# Allegro board BBB_SIMULATION.brd
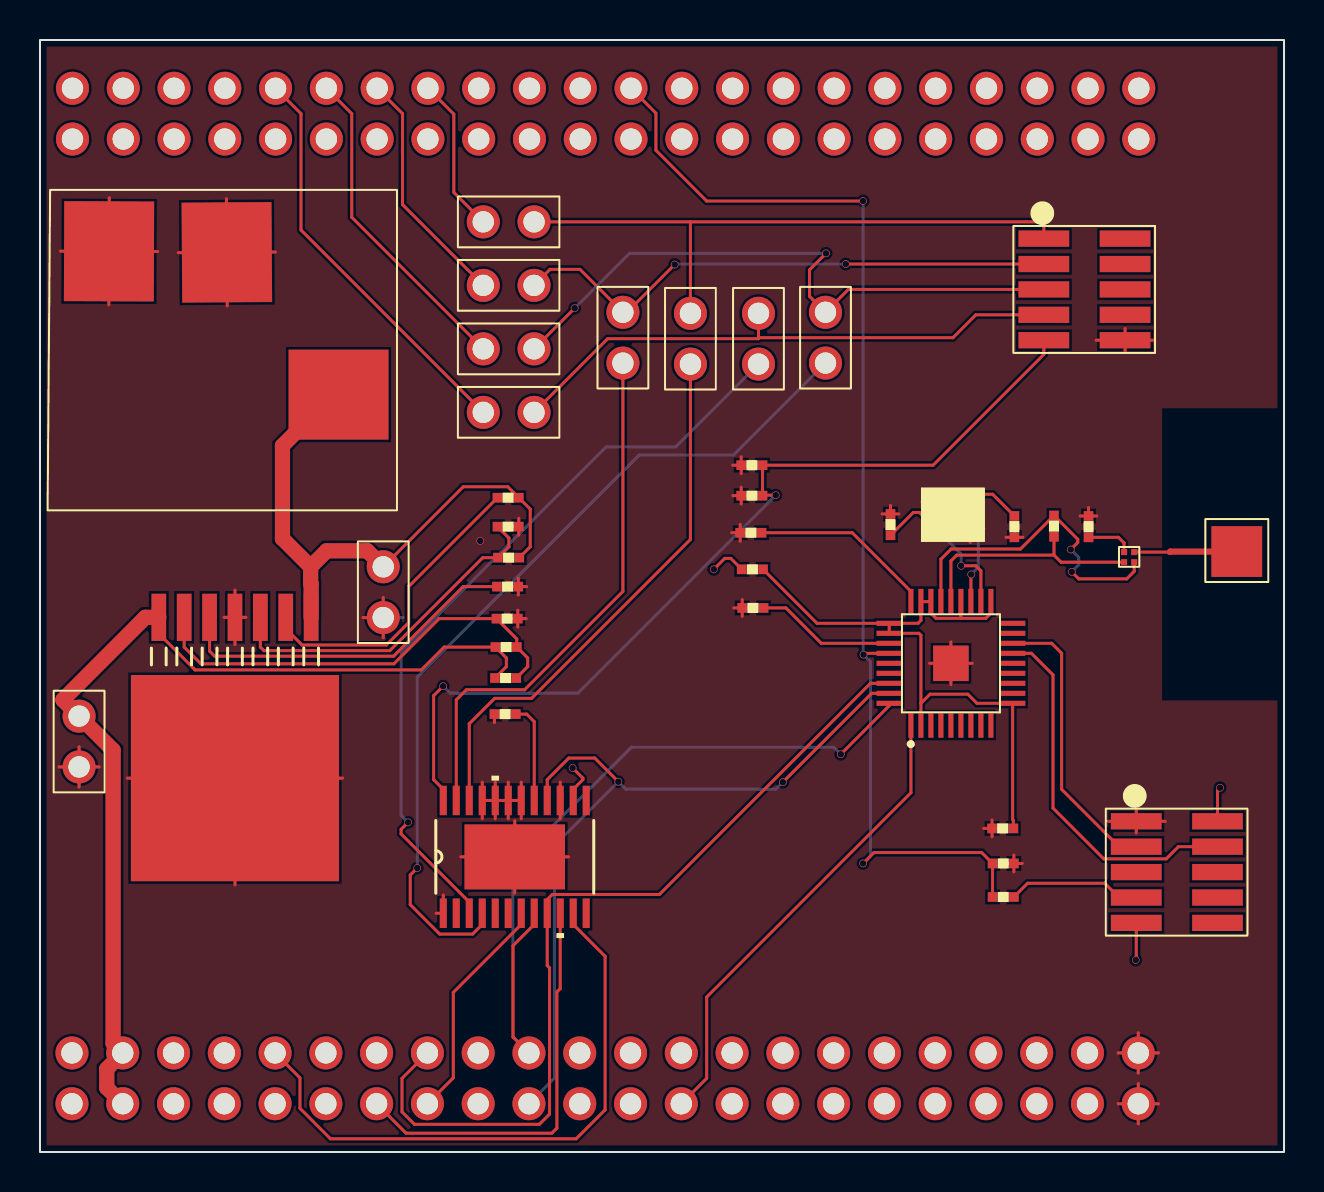
[diagram p0: board, top side]
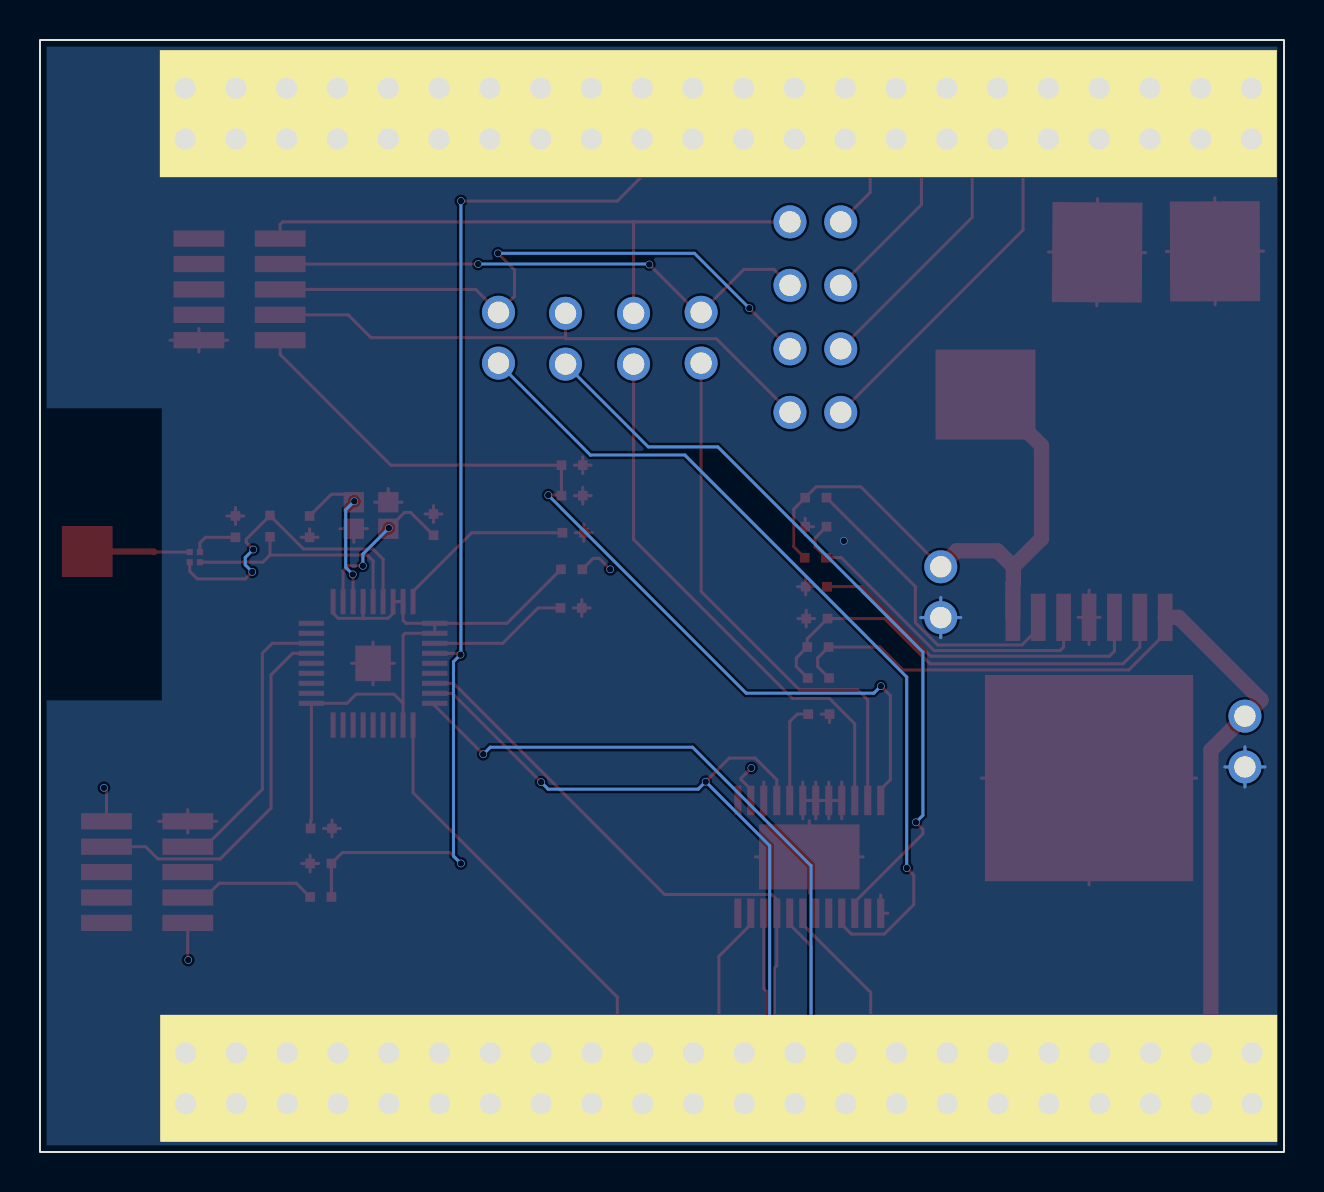
[diagram p1: board, bottom side, seen from below]

Outline 62.23 x 55.6 mm; copper layers: TOP, GND, MID, BOTTOM. Coordinates in mm from the lower left corner of the outline.
Outline path: rectangle 0,0 62.23,55.6

## Design rules (mm)
nets with their own width: min track width 0.152; nets +12V ANT_OUT FWD GND L N1397707 N1398168 N1398476 N1399253 N11168872 N11168888 N11169064 N11169128 N11169180 N11169188 N11169522 N11169534 N11169538 N11169588 N11178077 N11180588 N11180590 N11180592 N11180594 N11185911 N11185913 N11185915 N11185917 N11191313 NCLR NLDAC NSYNC R RESET_N RVR SPI_MISO SPI_MOSI SPI_NCS SPI_SCK VCC1 VCC3V VCC5V

## Placement (name value [footprint] x y rotation side)
C1  10uF  [JUMPER2]  15.9 30.53 270 top
C2  0.022uF  [C0402]  24.36 28.96 180 top
C3  100uF  [JUMPER2]  3.23 17.98 90 top
C4  0.022uF  [C0402]  22.35 24.56 0 top
C11  1uF  [C0402]  49.12 16.87 180 top
C12  1uF  [C0402]  36.63 27.89 180 top
C13  22pF  [C0402]  48.06 32.23 270 top
C14  22pF  [C0402]  43.23 30.4 90 top
C38  5.6pF  [C0402]  53.14 30.3 90 top
C40  1nF  [C0402]  47.22 13.74 0 top
C41  10uF  [C0402]  36.58 35.03 180 top
C42  0.1uF  [C0402]  36.58 33.5 180 top
C45  100nF  [C0402]  22.3 21.21 0 top
H1  Header1X1  [ANTENNA]  58.24 28.47 0 top
J2  CON5  [H5X2]  53.31 10.82 0 top
J3  CON5  [H5X2]  48.69 39.95 0 top
L1  10nH  [L0402]  51.05 30.43 90 top
L2  BEAD  [L0402]  34.77 28.8 0 top
R2  100k  [R0402]  24.28 33.05 180 top
R3  5.62k  [R0402]  24.16 24.03 180 top
R4  1.07k  [R0402]  22.5 26.34 0 top
R5  56k  [R0402]  36.42 31.29 180 top
R44  2.7k  [R0402]  49.05 13.08 180 top
R49  0  [JUMPER2]  37.21 38.13 90 top
R50  0  [JUMPER2]  40.56 38.18 90 top
R51  0  [JUMPER2]  30.43 38.18 90 top
R52  0  [JUMPER2]  33.81 38.13 90 top
R53  0  [JUMPER2]  20.9 35.71 0 top
R54  0  [JUMPER2]  20.9 38.89 0 top
R55  0  [JUMPER2]  20.9 42.06 0 top
R56  0  [JUMPER2]  20.9 45.24 0 top
RENB  11.8k  [R0402]  24.28 31.6 180 top
RENT  68.1k  [R0402]  22.58 29.39 0 top
U6  PJack  [PJ]  17.91 48.16 180 top
U7  1  [CC2510]  45.57 24.43 90 top
U8  BD2425N50ATI  [BALUN]  53.95 29.24 0 top
U9  connect22x2  [CONNECT22X2]  56.24 55.09 270 bottom
U10  connect22x2  [CONNECT22X2]  56.21 6.86 270 bottom
U11  Value  [AD5724]  23.75 14.76 90 top
U13  Value  [LMZ14203]  9.75 18.69 180 top
Y1  26MHz  [CRYST_26M]  47.32 33.38 180 top

## Library data of the parts
C1-C4 C11-C14 C38 C40-C42 C45 = C
H1 = Header1X1_3
J2 J3 = CON5_0
L1 L2 = INDUCTOR
R2-R4 R49-R56 = R_0
R5 R44 RENB RENT = R
U6 = PJack_0
U7 = cc2510f32rspr_1
U8 = Balun_BD2425N50ATI_1
U9 U10 = connect22x2
U11 = AD5724AREZ
U13 = LMZ14203_NDW_7
Y1 = CRYSTAL_2

## Footprints (pads in the part's own frame, mm; a bottom-side part is the same pattern mirrored in y, then rotated)
AD5724
  rect 1.473x0.356 smd: 1(-2.819,3.575) 2(-2.819,2.925) 3(-2.819,2.275) 4(-2.819,1.625) 5(-2.819,0.975) 6(-2.819,0.325) 7(-2.819,-0.325) 8(-2.819,-0.975) 9(-2.819,-1.625) 10(-2.819,-2.275) 11(-2.819,-2.925) 12(-2.819,-3.575) 13(2.819,-3.575) 14(2.819,-2.925) 15(2.819,-2.275) 16(2.819,-1.625) 17(2.819,-0.975) 18(2.819,-0.325) 19(2.819,0.325) 20(2.819,0.975) 21(2.819,1.625) 22(2.819,2.275) 23(2.819,2.925) 24(2.819,3.575)
  rect 3.251x5.029 smd: 25(0,0)
ANTENNA
  rect 2.54x2.54 smd: 1(1.626,1.549)
BALUN
  rect 0.305x0.305 smd: 1(0.279,0.762) 2(0.787,0.762) 3(0.787,0.254) 4(0.279,0.254)
C0402
  rect 0.483x0.483 smd: 1(0.432,0.686) 2(1.499,0.686)
CC2510
  rect 1.27x0.254 smd: 1(-3.086,2) 2(-3.086,1.5) 3(-3.086,1) 4(-3.086,0.5) 5(-3.086,0) 6(-3.086,-0.5) 7(-3.086,-1) 8(-3.086,-1.5) 9(-3.086,-2) 19(3.086,-2) 20(3.086,-1.5) 21(3.086,-1) 22(3.086,-0.5) 23(3.086,0) 24(3.086,0.5) 25(3.086,1) 26(3.086,1.5) 27(3.086,2)
  rect 0.254x1.27 smd: 10(-2,-3.086) 11(-1.5,-3.086) 12(-1,-3.086) 13(-0.5,-3.086) 14(0,-3.086) 15(0.5,-3.086) 16(1,-3.086) 17(1.5,-3.086) 18(2,-3.086) 28(2,3.086) 29(1.5,3.086) 30(1,3.086) 31(0.5,3.086) 32(0,3.086) 33(-0.5,3.086) 34(-1,3.086) 35(-1.5,3.086) 36(-2,3.086)
  rect 1.778x1.778 smd: 37(0,0)
CONNECT22X2
  round 1.651 hole 1.067: 1(4.445,54.61) 2(1.905,54.61) 3(4.445,52.07) 4(1.905,52.07) 5(4.445,49.53) 6(1.905,49.53) 7(4.445,46.99) 8(1.905,46.99) 9(4.445,44.45) 10(1.905,44.45) 11(4.445,41.91) 12(1.905,41.91) 13(4.445,39.37) 14(1.905,39.37) 15(4.445,36.83) 16(1.905,36.83) 17(4.445,34.29) 18(1.905,34.29) 19(4.445,31.75) 20(1.905,31.75) 21(4.445,29.21) 22(1.905,29.21) 23(4.445,26.67) 24(1.905,26.67) 25(4.445,24.13) 26(1.905,24.13) 27(4.445,21.59) 28(1.905,21.59) 29(4.445,19.05) 30(1.905,19.05) 31(4.445,16.51) 32(1.905,16.51) 33(4.445,13.97) 34(1.905,13.97) 35(4.445,11.43) 36(1.905,11.43) 37(4.445,8.89) 38(1.905,8.89) 39(4.445,6.35) 40(1.905,6.35) 41(4.445,3.81) 42(1.905,3.81) 43(4.445,1.27) 44(1.905,1.27)
CRYST_26M
  rect 1.016x1.016 smd: 1(0.787,0.889) 2(2.515,2.21) 3(2.515,0.889) 4(0.787,2.21)
H5X2
  rect 2.54x0.813 smd: 1(1.524,5.715) 2(5.588,5.715) 3(1.524,4.445) 4(5.588,4.445) 5(1.524,3.175) 6(5.588,3.175) 7(1.524,1.905) 8(5.588,1.905) 9(1.524,0.635) 10(5.588,0.635)
JUMPER2
  round 1.651 hole 1.067: 1(1.27,1.27) 2(3.81,1.27)
L0402
  rect 0.483x0.483 smd: 1(0.33,0.33) 2(1.397,0.33)
LMZ14203
  rect 0.737x2.362 smd: 1(-3.81,-8.039) 2(-2.54,-8.039) 3(-1.27,-8.039) 4(0,-8.039) 5(1.27,-8.039) 6(2.54,-8.039) 7(3.81,-8.039)
  rect 10.414x10.312 smd: 8(0,0)
PJ
  rect 5x4.5 smd: 1(2.972,10.287)
  rect 5x4.5 smd rot 90.4: 2(8.56,3.175)
  rect 5x4.5 smd rot 89.8: 3(14.453,3.124)
R0402
  rect 0.483x0.483 smd: 1(0.33,0.33) 2(1.397,0.33)

## Nets
+12V: C41.1 C42.1 J3.9 U11.24(AVDD)
GND: C1.2 C2.1 C3.1 C11.2 C12.2 C13.2 C14.2 C38.2 C40.2 C41.2 C42.2 C45.1 J2.1 J3.10 R4.2 R5.2 RENB.1 U6.2(GND) U6.3 U7.37(GND EXPOSED) U10.43 U10.44 U11.1(AVSS) U11.15(GND) U11.18(DAC_GND_1) U11.19(DAC_GND) U11.20(SIG_GND_1) U11.21(SIG_GND) U11.25(AVSS_1) U13.4(GND) U13.8 Y1.3(GND#3) Y1.4(GND#4)
VCC1: C11.1 L2.2 U7.2(DVDD#2) U7.10(DVDD#10) U7.19(AVDD#19) U7.22(AVDD#22) U7.25(AVDD#25) U7.26(AVDD#26) U7.28(GUARD) U7.29(AVDD_DREG)
VCC3V: J2.2 J2.9 L2.1 U10.1 U10.2 U11.14(DVCC)
VCC5V: C3.2 C4.1 R3.2 U10.3 U10.4 U13.7(VOUT)
ANT_OUT: H1.1 U8.2(UB_PORT)
FWD: J3.7 R49.2 R53.2
L: J3.3 R51.2 R55.2
NCLR: U10.10 U11.11(CLR)
NLDAC: U10.13 U11.10(LDAC)
NSYNC: U10.15 U11.7(SYNC)
R: J3.1 R52.2 R56.2
RESET_N: C40.1 R44.2 U7.31(RESET_N) U9.24
RVR: J3.5 R50.2 R54.2
SPI_MISO: U7.35(P1_4) U10.19 U11.16(SDO)
SPI_MOSI: U7.34(P1_5) U10.16 U11.9(SDIN)
SPI_NCS: U7.1(P1_2) U10.25
SPI_SCK: U7.36(P1_3) U10.20 U11.8(SCLK)
N1397707: C1.1 R2.1 RENT.2 U6.1(HOT) U13.1(VIN)
N1398168: R2.2 U13.2(RON)
N1398476: RENB.2 RENT.1 U13.3(EN)
N1399253: C4.2 R3.1 R4.1 U13.6(FB)
N11168872: L1.2 U7.24(RF_N) U8.3(B_PORT1)
N11168888: L1.1 U7.23(RF_P) U8.4(B_PORT2)
N11169064: C12.1 U7.30(DCOUPL)
N11169128: R5.1 U7.27(RBIAS)
N11169180: C13.1 U7.21(XOSC_Q1) Y1.1
N11169188: C14.1 U7.20(XOSC_Q2) Y1.2
N11169522: J2.7 R44.1
N11169534: J2.3 U7.16(P2_2)
N11169538: J2.4 U7.15(P2_1)
N11169588: C38.1 U8.1(GND)
N11178077: C45.2 U11.17(REFIN)
N11180588: R53.1 U9.10
N11180590: R54.1 U9.12
N11180592: R55.1 U9.14
N11180594: R56.1 U9.16
N11185911: R49.1 U11.3(VOUTA)
N11185913: R50.1 U11.4(VOUTB)
N11185915: R52.1 U11.22(VOUTD)
N11185917: R51.1 U11.23(VOUTC)
N11191313: C2.2 U13.5(SS)

Pads without a net: J2 5 6 8 10; J3 2 4 6 8; U7 3 4 5 6 7 8 9 11 12 13 14 17 18 32 33; U9 1 2 3 4 5 6 7 8 9 11 13 15 17 18 19 20 21 22 23 25 26 27 28 29 30 31 32 33 34 35 36 37 38 39 40 41 42 43 44; U10 5 6 7 8 9 11 12 14 17 18 21 22 23 24 26 27 28 29 30 31 32 33 34 35 36 37 38 39 40 41 42; U11 2 5 6 12 13

## Via types
v1: diameter 0.381, hole 0.33, TOP to BOTTOM, 25 vias

## Routing (per net, layer and track width the routed paths; a pad name or vN(x,y) marks a point on that pad's centre or on a via; arc(x,y) is an arc through that point)
+12V: length 46.3
  TOP w0.152: J3.9 50.22,39.88 44.68,34.34 C41.1 36.14,32.84 ; 36.14,32.84 v1(36.8,32.84) ; 36.14,32.84 C42.1 ; U11.24 20.17,18.14 19.69,18.62 19.69,22.82 v1(20.17,23.29)
  BOTTOM w0.152: v1(36.8,32.84) 26.9,22.94 20.52,22.94 v1(20.17,23.29)
GND: length 143.5
  TOP w0.152: 21.06,14.76 U11.25 ; U11.25 23.75,12.95 ; U11.25 23.75,16.56 ; U11.25 26.44,14.76 ; U7.37 46.63,24.43 ; U7.37 44.5,24.43 ; U7.37 45.57,23.37 ; U7.37 45.57,25.5 ; 48.72,14.01 C40.2 ; C40.2 48.72,14.85 ; C40.2 49.14,14.43 ; C40.2 48.3,14.43 ; 47.21,16.18 C11.2 ; C11.2 47.62,16.6 ; C11.2 48.04,16.18 ; C11.2 47.62,15.76 ; J2.1 54.84,17.12 ; J2.1 53.39,16.54 ; J2.1 54.84,15.95 ; J2.1 56.29,16.54 ; U11.19 U11.18 ; U11.19 23.42,16.66 ; U11.19 23.42,18.49 ; U11.19 U11.20 ; U11.18 24.07,18.49 ; U11.18 24.07,16.66 ; 54.94,3.95 U10.44 ; U10.44 53.94,4.95 ; U10.44 55.94,4.95 ; U10.44 54.94,5.96 ; C3.1 2.96,19.25 ; C3.1 1.96,18.25 ; C3.1 1.96,20.26 ; C3.1 0.95,19.25 ; C14.2 42.55,32.32 ; C14.2 42.96,31.9 ; C14.2 42.55,31.48 ; C14.2 42.13,31.9 ; U10.43 54.94,3.42 ; U10.43 54.94,1.41 ; U10.43 55.94,2.41 ; U10.43 53.94,2.41 ; 23.48,26.67 R4.2 ; R4.2 23.9,26.25 ; R4.2 24.32,26.67 ; R4.2 23.9,27.09 ; C42.2 35.5,32.82 ; C42.2 34.66,32.82 ; C42.2 35.08,33.24 ; C42.2 35.08,32.4 ; C41.2 35.5,34.34 ; C41.2 34.66,34.34 ; C41.2 35.08,34.76 ; C41.2 35.08,33.92 ; 3.44,42.36 U6.3 ; U6.3 3.46,47.71 ; U6.3 1.03,45.04 ; U6.3 5.88,45.03 ; U6.2 11.78,45 ; U6.2 9.33,47.66 ; U6.2 6.92,44.97 ; U6.2 9.37,42.3 ; 54.28,40 J3.10 ; J3.10 54.28,41.17 ; J3.10 52.83,40.59 ; J3.10 55.73,40.59 ; 23.15,21.89 C45.1 22.73,21.48 ; C38.2 52.45,32.22 ; C38.2 52.87,31.8 ; C38.2 52.45,31.38 ; C38.2 52.03,31.8 ; 17.17,25.72 C1.2 ; C1.2 16.17,26.72 ; C1.2 17.17,27.72 ; 34.61,30.96 R5.2 ; R5.2 35.03,31.38 ; R5.2 35.45,30.96 ; R5.2 35.03,30.54 ; U11.20 22.77,18.49 ; U11.20 U11.21 ; U11.20 22.77,16.66 ; 45.85,31.17 Y1.4 ; Y1.4 47.22,31.17 ; Y1.4 46.53,30.48 ; C13.2 49.16,30.73 ; C13.2 48.74,31.15 ; C13.2 48.32,30.73 ; U11.21 22.12,18.49 ; U11.21 22.12,16.66 ; C12.2 35.55,27.2 ; C12.2 35.13,27.62 ; C12.2 34.71,27.2 ; C12.2 35.13,26.78 ; 4.37,18.69 U13.8 ; U13.8 15.14,18.69 ; U13.8 9.75,13.36 ; 23.51,28.27 C2.1 ; C2.1 23.93,27.85 ; C2.1 23.93,28.69 ; C2.1 24.35,28.27 ; 9.21,26.73 U13.4 ; U13.4 9.75,25.37 ; U13.4 9.75,28.09 ; U13.4 10.3,26.73 ; 20.17,12.85 U11.1 19.82,11.94 ; 23.53,31.27 RENB.1 ; RENB.1 23.95,31.69 ; RENB.1 23.95,30.85 ; 44.12,32.49 Y1.3 ; Y1.3 45.49,32.49 ; Y1.3 44.81,33.17 ; 26.02,18.49 U11.15 26.02,16.66
  GND w0.152: 1.96,18.38 C3.1 ; C3.1 2.83,19.25 ; C3.1 1.96,20.13 ; C3.1 1.08,19.25 ; U10.43 55.82,2.41 ; U10.43 54.94,1.54 ; U10.43 54.06,2.41 ; U10.43 54.94,3.29 ; C1.2 17.17,27.6 ; C1.2 16.29,26.72 ; C1.2 18.05,26.72 ; C1.2 17.17,25.84 ; U10.44 54.94,5.83 ; U10.44 55.82,4.95 ; U10.44 54.94,4.08 ; U10.44 54.06,4.95
  BOTTOM w0.152: U10.44 55.94,4.95 ; U10.44 54.94,3.95 ; U10.44 53.94,4.95 ; U10.44 54.94,5.96 ; C1.2 17.17,27.72 ; C1.2 17.17,25.72 ; C1.2 18.17,26.72 ; C1.2 16.17,26.72 ; C3.1 2.96,19.25 ; C3.1 0.95,19.25 ; C3.1 1.96,18.25 ; C3.1 1.96,20.26 ; 53.94,2.41 U10.43 ; U10.43 54.94,3.42 ; U10.43 55.94,2.41 ; U10.43 54.94,1.41
  vias: v1(22.02,30.56)
VCC1: length 33.6
  TOP w0.152: U7.19 47.57,26.94 47.31,26.68 46.07,26.68 ; 46.07,26.68 44.82,26.68 44.57,26.94 U7.25 U7.26 44.07,26.58 43.92,26.43 U7.28 ; 46.07,26.68 U7.22 ; C11.1 48.69,16.59 48.65,16.62 U7.10 46.87,22.43 46.41,22.89 44.52,22.89 44.07,22.43 ; U7.28 38.87,26.43 L2.2 ; U7.28 U7.29 43.97,25.93 44.07,25.84 44.07,22.43 ; 44.07,22.43 U7.2
VCC3V: length 14.5
  TOP w0.152: J2.9 54.84,9.63 v1(54.81,9.6) ; v1(59.03,18.21) 58.9,18.08 J2.2 ; L2.1 34.56,29.68 34.25,29.68 v1(33.71,29.13) ; U11.14 26.67,18.14 27.16,18.62 27.16,18.69 v1(26.64,19.2)
  MID w0.152: U10.2 1.6,5.83 ; U10.2 2.48,4.95 ; U10.2 0.72,4.95 ; U10.2 1.6,4.08 ; U10.1 1.6,3.29 ; U10.1 2.48,2.41 ; U10.1 1.6,1.54 ; U10.1 0.72,2.41
VCC5V: length 49.5
  TOP w0.152: R3.2 23.33,24.27 23.33,24.7 22.78,25.25 20.22,25.25 19.08,24.1 7.76,24.1 5.94,25.92 U13.7
  TOP w0.762: U13.7 5.27,26.73 1.16,22.62 1.16,22.59 C3.2 3.66,20.09 3.66,5.44 U10.4 3.34,4.15 3.34,3.21 U10.3
ANT_OUT: length 5.1
  TOP w0.152: 56.52,30 U8.2
  TOP w0.305: H1.1 56.54,30.02 56.52,30
FWD: length 28.8
  TOP w0.152: R53.2 28.4,40.67 35.94,40.67 35.94,40.72 ; 35.94,40.72 45.67,40.72 46.81,41.86 J3.7 ; 35.94,40.72 R49.2
L: length 27.7
  TOP w0.152: v1(31.75,44.37) 29.36,41.99 R51.2 27.01,44.13 25.51,44.13 R55.2 ; v1(40.31,44.4) J3.3
  BOTTOM w0.152: v1(40.31,44.4) 31.78,44.4 v1(31.75,44.37)
NCLR: length 30.3
  TOP w0.152: U11.11 26.67,11.38 28.27,9.78 28.27,2.11 26.82,0.66 14.53,0.66 13,2.18 13,3.71 U10.10
NLDAC: length 20.5
  TOP w0.152: U10.13 18.31,0.94 25.6,0.94 25.86,1.19 25.86,8 26.02,8.17 U11.10
NSYNC: length 11.5
  TOP w0.152: U10.15 20.68,3.71 20.68,7.98 24.07,11.38 U11.7
R: length 30.8
  TOP w0.152: 32.54,46.51 50.09,46.51 50.22,46.38 J3.1 ; 32.54,46.51 R52.2 ; 32.54,46.51 R56.2
RESET_N: length 58.4
  TOP w0.152: v1(41.2,24.87) 41.26,24.93 U7.31 ; v1(41.17,14.43) 41.72,14.97 47.1,14.97 C40.1 R44.2 ; v1(41.17,47.55) 33.35,47.55 30.81,50.09 30.81,51.94 U9.24
  BOTTOM w0.152: v1(41.17,47.55) 41.17,24.89 v1(41.2,24.87) 41.55,24.52 41.55,14.8 v1(41.17,14.43)
RVR: length 31.6
  TOP w0.152: R54.2 v1(26.75,42.19) ; v1(39.32,44.93) 38.49,44.11 38.49,42.79 R50.2 40.44,43.13 J3.5
  BOTTOM w0.152: v1(39.32,44.93) 29.49,44.93 v1(26.75,42.19)
SPI_MISO: length 39.2
  TOP w0.152: U11.16 25.37,18.62 26.45,19.7 27.75,19.7 v1(28.93,18.52) ; v1(37.16,18.49) 41.6,22.93 U7.35
  BOTTOM w0.152: v1(37.16,18.49) 36.81,18.14 29.31,18.14 v1(28.93,18.52) 25.73,15.32 25.73,3.68 U10.19
SPI_MOSI: length 43.7
  TOP w0.152: U10.16 18.11,3.68 18.11,2.01 18.73,1.38 24.98,1.38 25.49,1.89 25.49,9.21 25.37,9.32 U11.9 25.37,12.62 25.63,12.88 30.98,12.88 41.54,23.43 U7.34
SPI_NCS: length 23.7
  TOP w0.152: U10.25 33.35,3.68 33.35,7.75 43.57,17.96 U7.1
SPI_SCK: length 40
  TOP w0.152: U11.8 24.72,11.38 23.66,10.32 23.66,5.75 U10.20 ; U7.36 42.48,22.31 v1(40.06,19.89)
  BOTTOM w0.152: U10.20 23.66,5.75 23.66,14.31 29.59,20.24 39.71,20.24 v1(40.06,19.89)
N1397707: length 29.5
  TOP w0.152: C1.1 21.17,33.26 23.41,33.26 R2.1 24.52,32.14 24.52,30.26 RENT.2
  TOP w0.762: 13.54,29.26 12.13,30.67 12.13,35.32 14.69,37.87 U6.1 ; 13.54,29.26 13.54,28.42 13.56,28.4 U13.1 ; 13.54,29.26 14.34,30.06 16.37,30.06 C1.1
N1398168: length 15.6
  TOP w0.152: U13.2 12.29,26.17 13.11,25.35 17.32,25.35 18.44,26.47 18.44,28.27 R2.2
N1398476: length 17.4
  TOP w0.152: U13.3 11.02,25.25 11.2,25.07 17.5,25.07 22.15,29.72 RENT.1 23.46,30.26 23.46,30.7 RENB.2
N1399253: length 22.2
  TOP w0.152: U13.6 7.21,25.25 8.05,24.41 17.7,24.41 19.96,26.67 R4.1 23.85,25.65 23.85,25.25 24.4,24.7 24.4,24.27 R3.1
N11168872: length 16.3
  TOP w0.152: U8.3 54.74,29.03 54.36,28.66 51.96,28.66 v1(51.61,29.01) ; U7.24 45.07,29.64 45.58,30.15 49.05,30.15 L1.2 51.91,30.64 51.91,30.47 v1(51.56,30.12)
  BOTTOM w0.152: v1(51.56,30.12) 51.96,29.72 51.96,29.36 v1(51.61,29.01)
N11168888: length 11.9
  TOP w0.152: 50.72,29.84 51.08,29.49 U8.4 ; 50.72,29.84 45.86,29.84 45.57,29.55 U7.23 ; 50.72,29.84 L1.1
N11169064: length 7
  TOP w0.152: C12.1 37.31,27.2 39.08,25.43 U7.30
N11169128: length 9.2
  TOP w0.152: U7.27 43.57,28.03 40.63,30.96 R5.1
N11169180: length 8.2
  TOP w0.152: v1(46.51,32.54) 46.86,32.89 47.66,32.89 C13.1 ; U7.21 46.57,28.86 v1(46.58,28.88)
  BOTTOM w0.152: v1(46.51,32.54) 46.93,32.11 46.93,29.23 v1(46.58,28.88)
N11169188: length 8.1
  TOP w0.152: v1(46.08,29.31) 46.81,29.31 47.07,29.06 U7.20 ; Y1.2 43.99,31.98 43.69,31.98 C14.1
  BOTTOM w0.152: v1(44.78,31.19) 46.08,29.9 v1(46.08,29.31)
N11169522: length 6.7
  TOP w0.152: J2.7 53.97,12.73 53.26,13.44 49.4,13.44 R44.1
N11169534: length 14.4
  TOP w0.152: U7.16 50.61,25.43 51.1,24.94 51.1,18.14 53.97,15.27 J2.3
N11169538: length 18.7
  TOP w0.152: J2.4 56.95,15.27 56.34,14.66 53.21,14.66 50.67,17.2 50.67,23.86 49.59,24.93 U7.15
N11169588: length 2.4
  TOP w0.152: U8.1 54.23,30.45 53.95,30.73 C38.1
N11178077: length 5
  TOP w0.152: U11.17 24.72,21.52 24.35,21.89 C45.2
N11180588: length 20.5
  TOP w0.152: R53.1 13.06,46.1 13.06,51.92 U9.10
N11180590: length 16.3
  TOP w0.152: R54.1 15.6,46.74 15.6,51.92 U9.12
N11180592: length 12.1
  TOP w0.152: R55.1 18.14,47.37 18.14,51.92 U9.14
N11180594: length 7.8
  TOP w0.152: U9.16 20.7,51.89 20.7,47.98 R56.1
N11185911: length 38.6
  TOP w0.152: v1(18.41,16.48) 18.06,16.13 18.06,15.91 21.47,12.5 U11.3
  BOTTOM w0.152: R49.1 31.8,35.26 28.32,35.26 18.06,25 18.06,16.84 v1(18.41,16.48)
N11185913: length 43.4
  TOP w0.152: U11.4 22.12,11.38 21.64,10.9 19.99,10.9 18.52,12.37 18.52,13.85 v1(18.87,14.2)
  BOTTOM w0.152: v1(18.87,14.2) 18.87,23.75 29.97,34.85 34.7,34.85 R50.1
N11185915: length 27.5
  TOP w0.152: R52.1 32.54,30.63 24.59,22.68 22.74,22.68 21.47,21.41 U11.22
N11185917: length 27
  TOP w0.152: U11.23 20.82,22.61 21.33,23.11 24.24,23.11 29.16,28.03 R51.1
N11191313: length 17.6
  TOP w0.152: U13.5 8.48,25.04 8.74,24.79 17.69,24.79 21.17,28.27 C2.2

## Copper pours and planes (outline as drawn; the poured copper is in the pictures)
GND on TOP: 0.33,0.33 0.33,55.27 61.9,55.27 61.9,37.19 56.13,37.19 56.13,22.58 61.9,22.58 61.9,0.33 ; 13 cut-outs
GND on BOTTOM: 0.33,0.33 0.33,55.27 61.9,55.27 61.9,37.19 56.13,37.19 56.13,22.58 61.9,22.58 61.9,0.33 ; 2 cut-outs
GND on GND: 0.33,0.33 0.33,55.27 61.9,55.27 61.9,37.19 56.13,37.19 56.13,22.58 61.9,22.58 61.9,0.33
VCC3V on MID: 0.33,0.33 0.33,55.27 61.9,55.27 61.9,37.19 56.13,37.19 56.13,22.58 61.9,22.58 61.9,0.33
